# EAGLE board OpAmpDaughterboard (EAGLE 5.11)
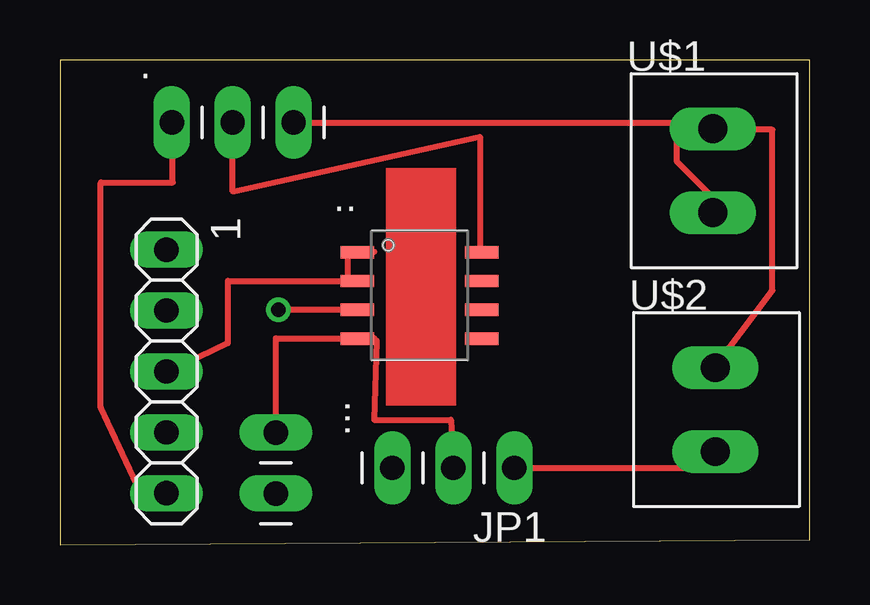
[diagram p0: board, top side]
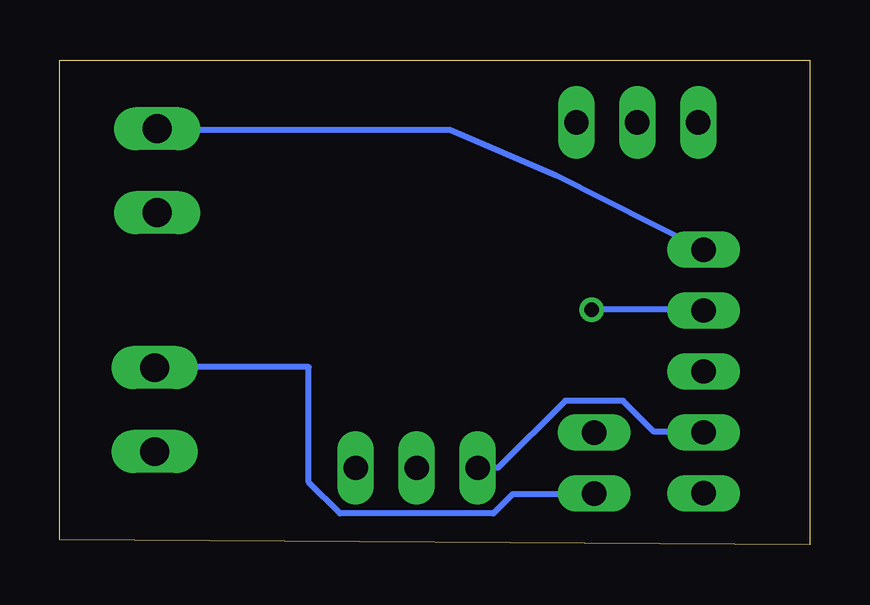
[diagram p1: board, bottom side, seen from below]

Size 31.27 x 20.21 mm. Coordinates in mm from the lower left corner, seen from the top.
Outline: 0,0 31.27,0.2 31.27,20.21 0,20.21 0,0
Copper layers (1*16): Top 0.035mm / dielectric 1.5mm / Bottom 0.035mm
Design rules "default *": minimum track width 10mil, minimum drill 24mil, track to track 8mil, track to pad 8mil, pad to pad 8mil, via to via 8mil, smd to smd 8mil, copper to edge 40mil, drill to drill 8mil, minimum pad ring 10mil, minimum via ring 8mil, stop-mask expansion 4mil, vias tented up to drill 0mil, thermal gap 10mil

## Footprints (pad centres in the part's own frame; a part is rotated, then mirrored left to right if it is on the bottom)
1X05 = drill 1.016 long: 1 -5.08,0; 2 -2.54,0; 3 0,0; 4 2.54,0; 5 5.08,0
1X03 = drill 1.016 long: 1 -2.54,0; 2 0,0; 3 2.54,0
AD8397 = smd 1.4 x 0.51: 1 -2.5,1.5; 2 -2.5,0.3; 3 -2.5,-0.9; 4 -2.5,-2.1; 5 2.7,-2.1; 6 2.7,-0.9; 7 2.7,0.3; 8 2.7,1.5
1X02 = drill 1.016 long: 1 -1.27,0; 2 1.27,0
SPARK_SCREW_TERM = drill 1.2 long: 1 0,-1.8; 2 0,1.7

## Placement (x,y rotation side)
1  0  [1X05]  4.44,7.22 270 top
.  [1X03]  7.2,17.6 0 top
..  AD8397  [AD8397]  14.89,10.69 0 top
...  [1X02]  9,3.4 270 top
JP1  [1X03]  16.4,3.2 180 top
U$1  SPARK_SCREW_TERM  [SPARK_SCREW_TERM]  27.22,15.64 0 top
U$2  SPARK_SCREW_TERM  [SPARK_SCREW_TERM]  27.32,5.68 0 top

## Library data of the parts
1 . ... JP1 = pinhead
.. = ardustat
U$1 U$2 = ardustatv2

## Nets
N$1: ..2 ...8
N$2: 1.3 ...1 ...2
N$3: 1.2 ...3
N$4: 1.1 ....2 U$1.2 U$2.2
N$5: 1.5 ..1
N$6: ..3 U$1.1
N$7: ...4 ....1 JP1.2
N$8: 1.4 JP1.3
N$9: JP1.1 U$2.1

## Tracks (layer width: path | path; a pad name or v marks a point on that pad's centre or on a via)
N$1
  Top 0.254: ..2 7.2,14.72 17.5,17.01 17.5,12.2 ...8
N$2
  Top 0.254: 12.3,11 ...2 12.3,11 | 12,11 12,12.1 13.1,12.2 ...1 | 12,11 7,11 7,8.4 4.5,7.2 1.3 | 12,11 12.3,11
N$3  (via drill 0.61)
  Top 0.254: v9.1,9.8 12.3,9.8 ...3
  Bottom 0.254: v9.1,9.8 4.5,9.8 1.2
N$4
  Top 0.254: U$2.2 27.3,7.4 29.7,10.6 29.7,17.3 27.2,17.3 U$1.2
  Bottom 0.254: ....2 9,2.1 12.4,2.1 13.2,1.3 19.6,1.3 20.9,2.6 20.9,7.4 27.3,7.4 U$2.2 | 1.1 10.6,15.4 15,17.3 27.2,17.3 U$1.2
N$5
  Top 0.254: 1.5 4.4,2.2 3.2,2.5 1.7,5.7 1.7,15.1 4.7,15.1 4.7,17.6 ..1
N$6
  Top 0.254: ..3 25.7,17.6 25.7,16 27.2,14.5 27.2,13.9 U$1.1
N$7
  Top 0.254: ....1 9,8.6 12.3,8.6 ...4 12.5,8.6 13.1,8.6 13.2,8.5 13.1,5.2 16.3,5.2 JP1.2
N$8
  Bottom 0.254: 1.4 4.5,4.7 6.5,4.7 7.8,6 10.2,6 13,3.2 JP1.3
N$9
  Top 0.254: JP1.1 27.3,3.2 27.3,3.8 U$2.1
(copper drawn outside any net)
  shapes: Top area x1